# EAGLE board motor+pot (EAGLE 9.1.0)
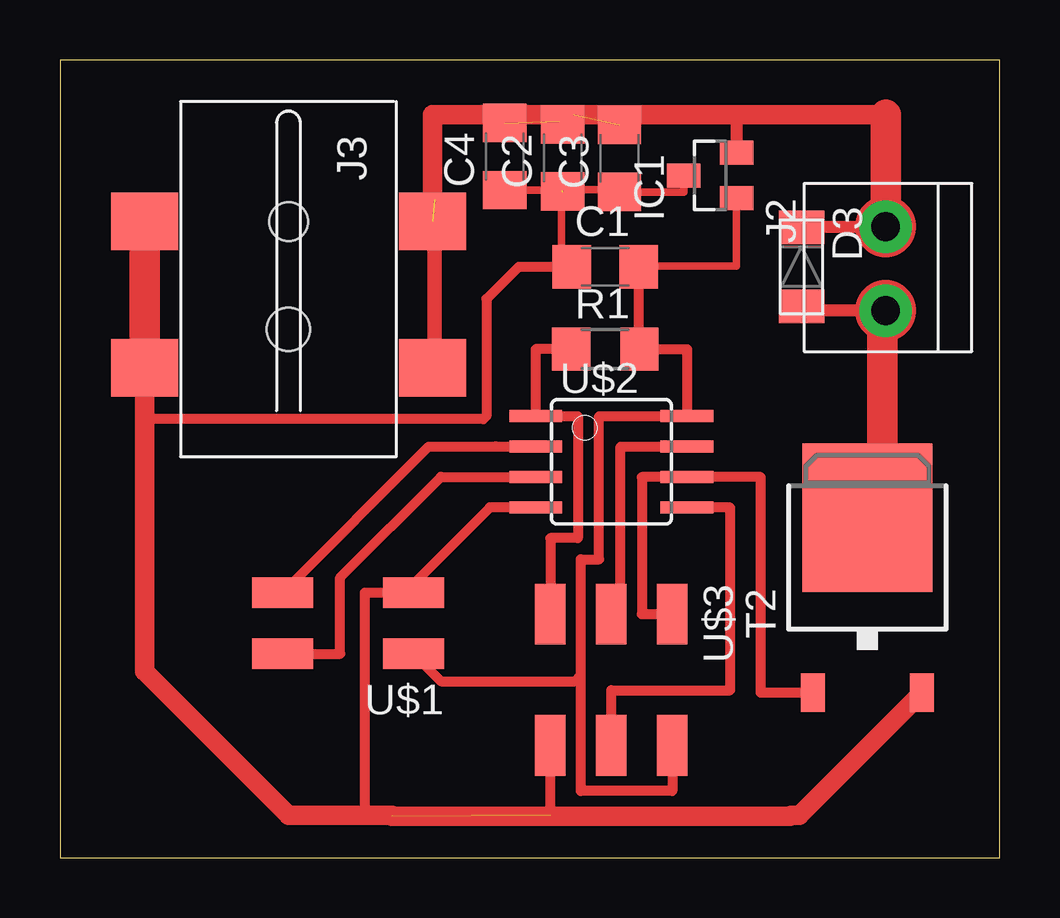
[diagram p0: board, top side]
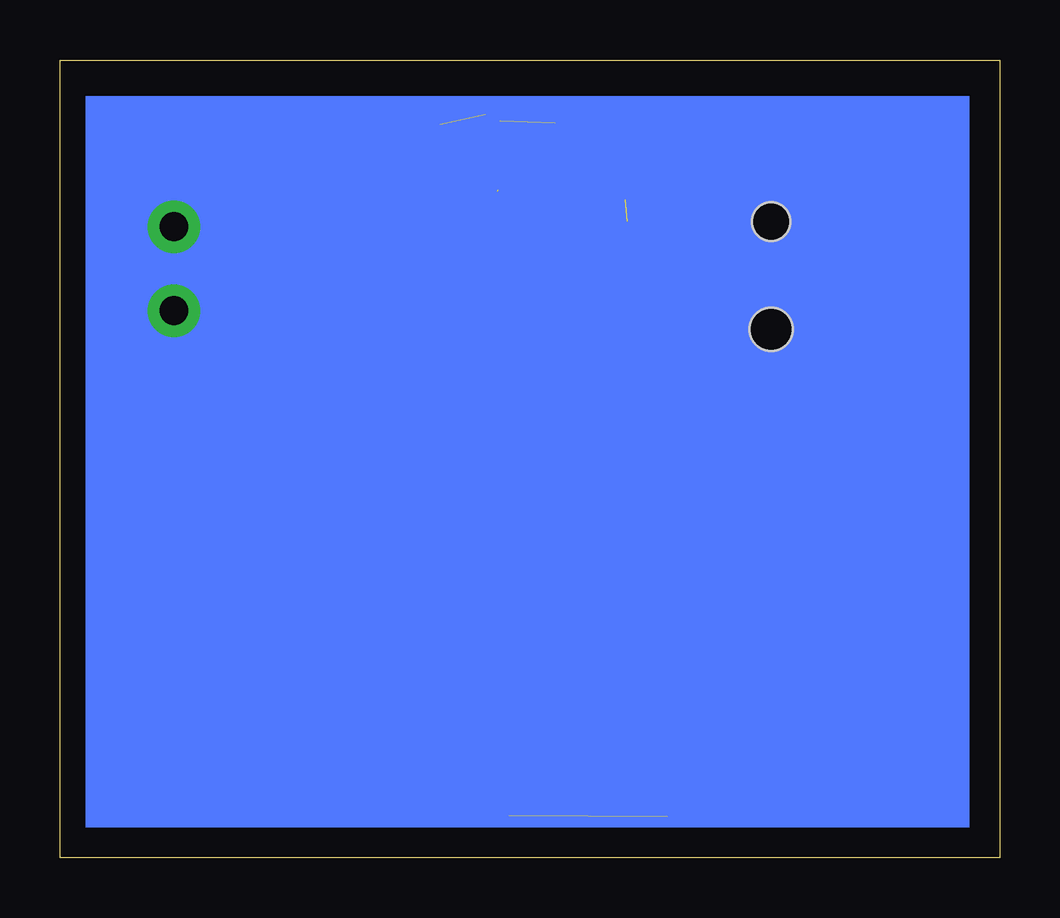
[diagram p1: board, bottom side, seen from below]

Size 39.17 x 33.26 mm. Coordinates in mm from the lower left corner, seen from the top.
Outline: 0,0 39.17,0 39.17,33.26 0,33.26 0,0
Copper layers (1*16): Top 0.035mm / dielectric 1.5mm / Bottom 0.035mm
Design rules "default": minimum track width 10mil, minimum drill 24mil, track to track 8mil, track to pad 8mil, pad to pad 8mil, via to via 8mil, smd to smd 8mil, copper to edge 40mil, drill to drill 8mil, minimum pad ring 10mil, minimum via ring 8mil, stop-mask expansion 4mil, vias tented up to drill 0mil, thermal gap 10mil

## Footprints (pad centres in the part's own frame; a part is rotated, then mirrored left to right if it is on the bottom)
C1206 = smd 1.6 x 1.8: 1 -1.4,0; 2 1.4,0
MINI-SMA = smd 1.4 x 1.9: ANODE 1.65,0; KATHODE -1.65,0
SOT23 = smd 1 x 1.4: 1 -0.95,-1.1; 2 0.95,-1.1; 3 0,1.1
ED555DS-2DS = drill 1.2 pad 2.184: 1 1.8,0; 2 -1.7,0
PJ-002AH-SMT = smd 2.4 x 2.8: CONTACT -2.4,-6; PIN1 3.7,6; PIN2 -2.4,6; SHUNT 3.7,-6 | hole 1.6: -2.4,0 | hole 1.8: 2.1,0
R1206 = smd 1.6 x 1.803: 1 -1.422,0; 2 1.422,0
TO252 = smd 1 x 1.6: 1 -2.28,-4.8; 2 2.28,-4.8 | smd 5.4 x 6.2: 3 0,2.5
2X02SMD = smd 2.54 x 1.27: 1 -2.54,1.27; 2 2.92,1.27; 3 -2.54,-1.27; 4 2.92,-1.27
SOIC8 = smd 0.5 x 2.2: 1 -1.905,-3.154; 2 -0.645,-3.154; 3 0.625,-3.154; 4 1.895,-3.154; 5 1.905,3.154; 6 0.635,3.154; 7 -0.635,3.154; 8 -1.905,3.154
2X03SMD = smd 2.54 x 1.27: 1 -2.54,2.54; 2 2.92,2.54; 3 -2.54,0; 4 2.92,0; 5 -2.54,-2.54; 6 2.92,-2.54

## Placement (x,y rotation side)
C1  CAP-UNPOLARIZED  [C1206]  22.73,24.64 0 top
C2  [C1206]  20.95,29.18 90 top
C3  [C1206]  23.32,29.16 90 top
C4  [C1206]  18.54,29.24 90 top
D3  CDBM1100-G  [MINI-SMA]  30.91,24.64 270 top
IC1  [SOT23]  27.1,28.45 90 top
J2  TERM-1X02-FABLAB  [ED555DS-2DS]  34.42,24.51 90 top
J3  JACK-2.1MM  [PJ-002AH-SMT]  9.53,24.13 270 top
R1  [R1206]  22.73,21.21 0 top
T2  [TO252]  33.66,11.68 0 top
U$1  PINHD-2X2-SMD  [2X02SMD]  12.19,9.78 180 top
U$2  ATTINY45SI  [SOIC8]  22.99,16.51 270 top
U$3  AVRISPSMD  [2X03SMD]  22.99,7.62 270 top

## Library data of the parts
C1 U$2 U$3 = fab copy
C2-C4 D3 IC1 J2 R1 T2 U$1 = fab
J3 = fab 

## Nets
GND: C1.1 C2.1 C3.1 C4.1 IC1.3 J3.CONTACT J3.SHUNT T2.2 U$1.3 U$2.4 U$3.6
N$3: U$2.5 U$3.4
N$6: R1.1 U$2.1 U$3.5
N$10: D3.ANODE J2.2 T2.3
PB4: U$1.2 U$2.3
POT_IN: U$1.4 U$2.2
T1G: T2.1 U$2.6 U$3.1
T2G: U$2.7 U$3.3
VCC: C1.2 IC1.1 R1.2 U$1.1 U$2.8 U$3.2
VIN: C2.2 C3.2 C4.2 D3.KATHODE IC1.2 J2.1 J3.PIN1 J3.PIN2

## Tracks (layer width: path | path; a pad name or v marks a point on that pad's centre or on a via)
GND  (2 unrouted)
  Top 0.305: C4.1 20.9,27.84 | IC1.3 26,27.76 C3.1 23.22,27.86 20.9,27.86 20.9,27.84 | C1.1 20.9,24.64 20.9,27.84
  Top 0.406: 20.45,1.78 U$3.6 | C1.1 19.12,24.64 17.78,23.3 17.78,18.41 17.65,18.29 3.52,18.29 | 12.7,1.78 12.7,11.05 U$1.3 14.73,11.43 17.92,14.62 U$2.4 | 13.84,1.78 13.84,1.73
  Top 0.813: 13.84,1.73 30.43,1.73 30.48,1.78 30.83,1.78 T2.2 | 13.84,1.78 12.7,1.78 12.06,1.78 9.53,1.78 3.52,7.78 3.52,17.78 3.52,18.29 J3.SHUNT
  Top 1.27: J3.CONTACT J3.SHUNT
N$3
  Top 0.406: U$3.4 22.99,6.99 27.94,6.99 27.94,14.61 U$2.5
N$6
  Top 0.406: U$3.5 20.45,13.34 21.59,13.34 21.59,18.41 U$2.1 19.83,21.21 R1.1
N$10
  Top 0.508: D3.ANODE 31.09,22.81 J2.2
  Top 1.27: T2.3 34.29,14.82 34.29,22.68 J2.2
PB4
  Top 0.406: U$1.2 11.68,8.51 11.68,11.68 15.88,15.88 U$2.3
POT_IN
  Top 0.406: U$2.2 18.17,17.16 18.16,17.14 15.37,17.14 U$1.4
T1G
  Top 0.406: U$2.6 25.78,15.88 | 25.78,15.88 24.26,15.88 24.26,10.16 U$3.1 | T2.1 29.21,6.88 29.21,15.88 25.78,15.88
T2G
  Top 0.406: U$3.3 23.37,10.16 23.37,17.14 U$2.7
VCC
  Top 0.305: IC1.1 28.2,24.66 24.13,24.66 C1.2
  Top 0.406: U$3.2 25.53,2.79 21.72,2.79 21.72,7.62 | 21.72,7.62 21.72,12.45 22.48,12.45 22.48,18.41 U$2.8 26.14,21.21 R1.2 24.13,21.21 C1.2 | 21.72,7.62 21.46,7.37 15.88,7.37 U$1.1
VIN  (3 unrouted)
  Top 0.406: C2.2 20.83,30.71 20.83,30.99
  Top 0.508: 28.2,30.99 IC1.2 | D3.KATHODE 34.39,26.29 J2.1
  Top 0.61: 15.62,27.43 15.62,20.53 J3.PIN1
  Top 0.813: 34.42,30.99 28.2,30.99 27.49,30.99 25.41,30.99 21.42,30.99 20.83,30.99 15.53,30.99 J3.PIN2
  Top 1.27: 34.42,30.99 J2.1
(copper drawn outside any net)
  shapes: Bottom area x1, Top circle x2